# EAGLE board charlieplex20 (EAGLE 6.5.0)

Size 160 x 100 mm. Coordinates in mm from the lower left corner, seen from the top.
Outline: 0,0 160,0 160,100 0,100 0,0
Copper layers (1*16): Top 0.035559375mm / dielectric 1.501140625mm / Bottom 0.035559375mm
Design rules "default": minimum track width 8mil, minimum drill 20mil, track to track 8mil, track to pad 8mil, pad to pad 8mil, via to via 8mil, smd to smd 8mil, copper to edge 10mil, drill to drill 8mil, minimum pad ring 12mil, minimum via ring 10mil, stop-mask expansion 4mil, vias tented up to drill 20mil, thermal gap 10mil

## Footprints (pad centres in the part's own frame; a part is rotated, then mirrored left to right if it is on the bottom)
LED-0603 = smd 1 x 1: A 0,-0.877; C 0,0.877
0603-RES = smd 1.1 x 1: 1 -0.85,0; 2 0.85,0
DIP08 = drill 0.813 pad 1.727 octagon: 1 -3.81,-3.81; 2 -1.27,-3.81; 3 1.27,-3.81; 4 3.81,-3.81; 5 3.81,3.81; 6 1.27,3.81; 7 -1.27,3.81; 8 -3.81,3.81

## Placement (x,y rotation side)
LED1  [LED-0603]  -30.48,2.54 0 top  (outside the outline)
LED2  [LED-0603]  -33.02,2.54 0 top  (outside the outline)
LED3  [LED-0603]  -35.56,2.54 0 top  (outside the outline)
LED4  [LED-0603]  -13.97,11.43 0 top  (outside the outline)
LED5  [LED-0603]  -16.51,11.43 0 top  (outside the outline)
LED6  [LED-0603]  -19.05,11.43 0 top  (outside the outline)
LED7  [LED-0603]  -21.59,11.43 0 top  (outside the outline)
LED8  [LED-0603]  -24.13,11.43 0 top  (outside the outline)
LED9  [LED-0603]  -26.67,11.43 0 top  (outside the outline)
LED10  [LED-0603]  -29.21,11.43 0 top  (outside the outline)
LED11  [LED-0603]  -31.75,11.43 0 top  (outside the outline)
LED12  [LED-0603]  -34.29,11.43 0 top  (outside the outline)
LED13  [LED-0603]  -36.83,11.43 0 top  (outside the outline)
LED14  [LED-0603]  -13.97,15.24 0 top  (outside the outline)
LED15  [LED-0603]  -16.51,15.24 0 top  (outside the outline)
LED16  [LED-0603]  -19.05,15.24 0 top  (outside the outline)
LED17  [LED-0603]  -21.59,15.24 0 top  (outside the outline)
LED18  [LED-0603]  -24.13,15.24 0 top  (outside the outline)
LED19  [LED-0603]  -26.67,15.24 0 top  (outside the outline)
LED20  [LED-0603]  -29.21,15.24 0 top  (outside the outline)
R1  [0603-RES]  -33.02,13.97 0 top  (outside the outline)
R2  [0603-RES]  -15.24,17.78 0 top  (outside the outline)
R3  [0603-RES]  -19.05,17.78 0 top  (outside the outline)
R4  [0603-RES]  -22.86,17.78 0 top  (outside the outline)
R5  [0603-RES]  -26.67,17.78 0 top  (outside the outline)
R6  [0603-RES]  -30.48,17.78 0 top  (outside the outline)
R7  [0603-RES]  -34.29,17.78 0 top  (outside the outline)
R8  [0603-RES]  -15.24,20.32 0 top  (outside the outline)
R9  [0603-RES]  -19.05,20.32 0 top  (outside the outline)
R10  [0603-RES]  -22.86,20.32 0 top  (outside the outline)
R11  [0603-RES]  -26.67,20.32 0 top  (outside the outline)
R12  [0603-RES]  -30.48,20.32 0 top  (outside the outline)
R13  [0603-RES]  -34.29,20.32 0 top  (outside the outline)
R14  [0603-RES]  -15.24,22.86 0 top  (outside the outline)
R15  [0603-RES]  -19.05,22.86 0 top  (outside the outline)
R16  [0603-RES]  -22.86,22.86 0 top  (outside the outline)
R17  [0603-RES]  -26.67,22.86 0 top  (outside the outline)
R18  [0603-RES]  -30.48,22.86 0 top  (outside the outline)
R19  [0603-RES]  -34.29,22.86 0 top  (outside the outline)
R20  [0603-RES]  -15.24,25.4 0 top  (outside the outline)
U$1  ATTINY13DIP  [DIP08]  -21.59,5.08 0 top  (outside the outline)

## Library data of the parts
LED1-LED20 = SparkFun-LED
R1-R20 = SparkFun-Resistors
U$1 = SparkFun-DigitalIC

## Nets
C1: LED7.A LED11.A LED15.A LED19.A R8.1 R12.1 R16.1 R20.1
C2: LED5.A LED8.A LED13.A LED17.A R6.1 R7.1 R14.1 R18.1
C3: LED3.A LED6.A LED9.A LED12.A R4.1 R5.1 R10.1 R11.1
C4: LED1.A LED4.A LED14.A LED16.A R2.1 R3.1 R13.1 R15.1
C5: LED2.A LED10.A LED18.A LED20.A R1.1 R9.1 R17.1 R19.1
N$1: LED1.C R1.2
N$2: LED2.C R2.2
N$3: LED3.C R3.2
N$4: LED4.C R4.2
N$5: LED5.C R5.2
N$6: LED6.C R6.2
N$7: LED8.C R8.2
N$8: LED7.C R7.2
N$9: LED9.C R9.2
N$10: LED10.C R10.2
N$11: LED11.C R11.2
N$12: LED12.C R12.2
N$13: LED13.C R13.2
N$14: LED14.C R14.2
N$15: LED15.C R15.2
N$17: LED16.C R16.2
N$24: LED17.C R17.2
N$25: LED18.C R18.2
N$28: LED19.C R19.2
N$29: LED20.C R20.2

## Tracks (layer width: path | path; a pad name or v marks a point on that pad's centre or on a via)
C1  (7 unrouted)
C2  (7 unrouted)
C3  (7 unrouted)
C4  (7 unrouted)
C5  (7 unrouted)
N$1  (1 unrouted)
N$2  (1 unrouted)
N$3  (1 unrouted)
N$4  (1 unrouted)
N$5  (1 unrouted)
N$6  (1 unrouted)
N$7  (1 unrouted)
N$8  (1 unrouted)
N$9  (1 unrouted)
N$10  (1 unrouted)
N$11  (1 unrouted)
N$12  (1 unrouted)
N$13  (1 unrouted)
N$14  (1 unrouted)
N$15  (1 unrouted)
N$17  (1 unrouted)
N$24  (1 unrouted)
N$25  (1 unrouted)
N$28  (1 unrouted)
N$29  (1 unrouted)